# Altium PCB 智能家居-电灯-电力板.PcbDoc
Units mm, origin at the board's own origin, x right, y up, seen from the top; angles counter-clockwise.
Board outline 65 x 65 mm, 2 copper layers (Top Layer, Bottom Layer); 15 components, 12 nets, 45 pads, 0 vias.
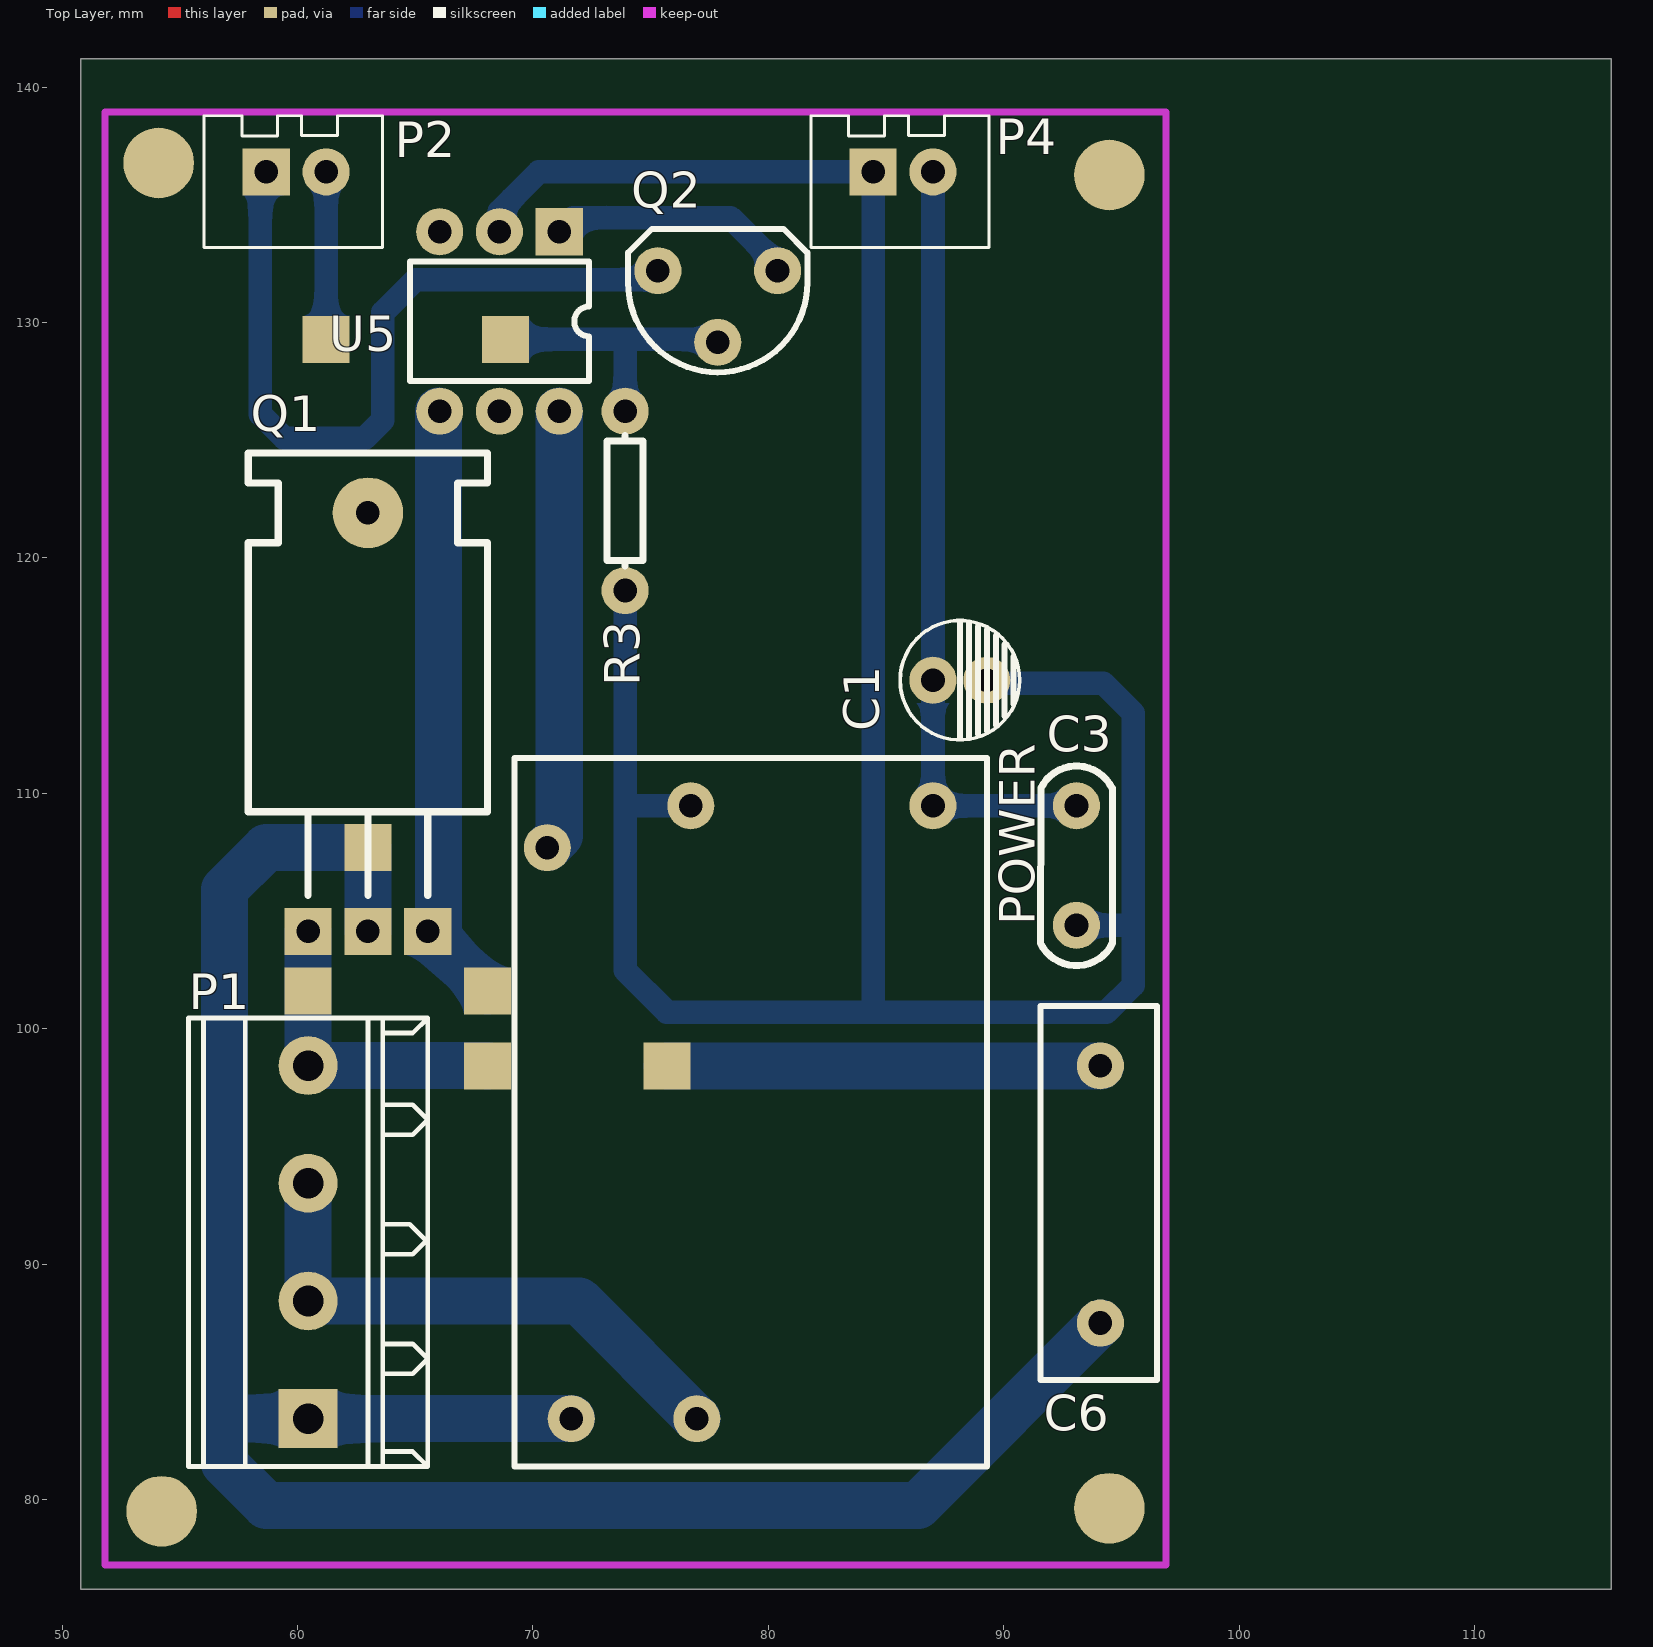
[diagram p0: Top Layer view]
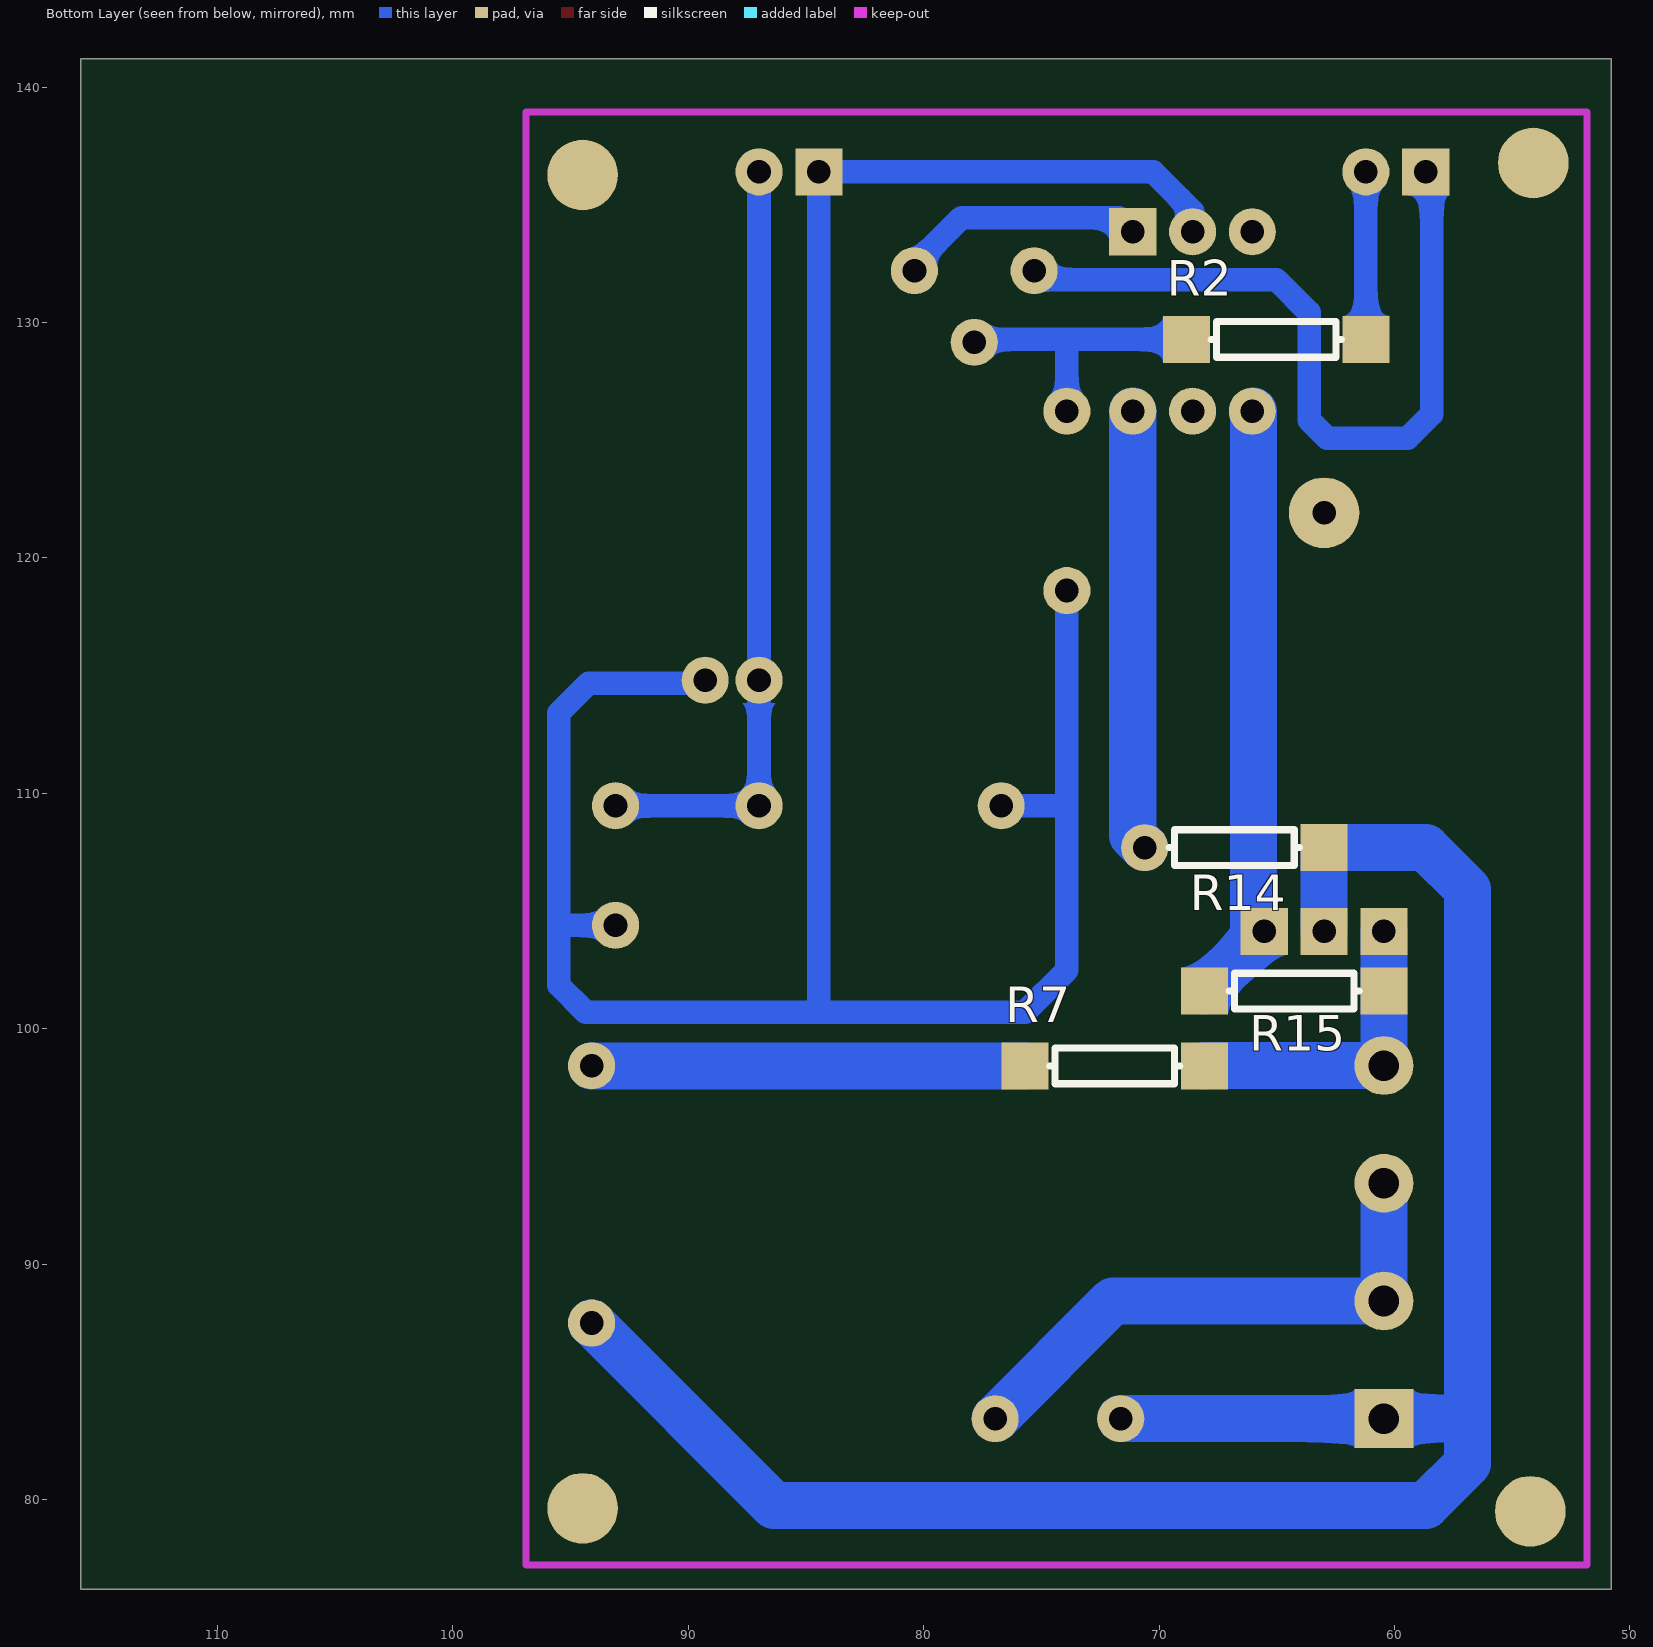
[diagram p1: Bottom Layer view, seen from below]

## Layer stack, top to bottom
Top Solder: solder mask 0.0102, Solder Resist, Dk 3.5
Top Layer: signal copper 0.0356
Dielectric 1: dielectric 0.32, FR-4, Dk 4.8
Bottom Layer: signal copper 0.0356
Bottom Solder: solder mask 0.0102, Solder Resist, Dk 3.5

## Board outline
50.8,76.2 115.8,76.2 115.8,141.2 50.8,141.2

## Design rules (kind name [scope] priority, off if disabled: settings)
Clearance [All] p1: gap=0.5
PolygonConnect [All] p1: connectstyle=Relief reliefconductorwidth=0.254 reliefentries=4 polygonreliefangle="90 Angle" airgapwidth=0.254
RoutingVias [All] p1: holewidth=1 width=2 viastyle="Through Hole" minholewidth=0.711 minwidth=1.27 maxholewidth=0.711 maxwidth=1.27
SolderMaskExpansion [All] p1: expansion=0.102
Width [All] p1: maxlimit=5 minlimit=0.5 preferedwidth=0.5 minimp=50.000000 maximp=50.000000 favimp=50.000000
30 further rules are at their usual default settings.

## Components (designator, comment, footprint, x,y, rotation, side; value= is the part's Value field where it differs from the comment)
C1 "Cap Pol1" CD5 86.995,114.808 r90 top
C3 "0.01uF" 0.1UF 93.091,106.934 r270 top
C6 "Cap" 0.1UF/275V 94.107,98.425 r270 top
P1 "电源端口" JK128-500-4P 60.452,83.439 r180 top
P2 "双向可控硅控制端口" TJC3-2A 58.674,136.398 r0 top
P4 "控制板电源端口" TJC3-2A 84.455,136.398 r0 top
POWER "220/5开关电源" 220/5开关电源 71.628,83.439 r90 top
Q1 "Triac" TO-220(2) 60.452,104.14 r0 top
Q2 "NPN" TO-92D 77.851,132.207 r180 top
R2 "4.7K" AXIAL0.3#1 65.024,129.286 r0 bottom
R3 "4.7K" AXIAL0.3#2 73.914,122.428 r270 top
R7 "100" AXIAL0.3#1 71.882,98.425 r0 bottom
R14 "300" AXIAL0.3#3 66.802,107.696 r0 bottom
R15 "300" AXIAL0.3#1 64.262,101.6 r0 bottom
U5 "MOC3061" DIP-6N 71.12,133.858 r270 top

## Footprints (in the part's own frame and the unit in brackets; to place one, negate y for a bottom-side part, rotate by r counter-clockwise, add the part's x,y. Pads: shape width x height; smd on the part's side, far side on the other; paste and mask are expansions set on the pad)
0.1UF [mm]
  round 2 hole 1: 1(-2.54,0) 2(2.54,0)
  silkscreen extent -4.22,-1.52 4.25,1.53
0.1UF/275V [mm]
  round 2 hole 1: 1(0,0) 2(10.922,0)
  silkscreen extent -2.54,-2.54 13.33,2.41
220/5开关电源 [mm]
  round 2 hole 1: 1(0,0) 2(0,-5.334) 3(26.035,-5.08) 4(26.035,-15.367)
  silkscreen extent -2.03,-17.65 28.07,2.41
AXIAL0.3#1 [mm]
  rect 2x2 all layers, no hole: 1(-3.81,0) 2(3.81,0)
  silkscreen extent -2.77,-0.76 2.77,0.76
AXIAL0.3#2 [mm]
  round 2 hole 1: 1(-3.81,0) 2(3.81,0)
  silkscreen extent -2.77,-0.76 2.77,0.76
AXIAL0.3#3 [mm]
  rect 2x2 all layers, no hole: 1(-3.81,0)
  round 2 hole 1: 2(3.81,0)
  silkscreen extent -2.77,-0.76 2.77,0.76
CD5 [mm]
  round 2 hole 1: 1(0,0) 2(0,-2.286)
  silkscreen extent -2.54,-3.68 2.54,1.4
DIP-6N [mm]
  rect 2x2 hole 1: 1(0,0)
  round 2 hole 1: 2(0,-2.54) 3(0,-5.08) 4(7.62,-5.08) 5(7.62,-2.54) 6(7.62,0)
  silkscreen extent 1.27,-6.35 6.35,1.27
JK128-500-4P [mm]
  rect 2.5x2.5 hole 1.3: 1(0,0)
  round 2.5 hole 1.3: 2(0,-5) 3(0,-10) 4(0,-15)
  silkscreen extent -5.08,-17.02 5.08,2.03
TJC3-2A [mm]
  rect 2x2 hole 1: 1(0,0)
  round 2 hole 1: 2(2.54,0)
  silkscreen extent -2.64,-3.2 4.93,2.39
TO-92D [mm]
  round 2 hole 1: 1(-2.54,0) 2(0,3.048) 3(2.54,0)
  silkscreen extent -3.81,-1.78 3.81,4.32
TO-220(2) [mm]
  round 3 hole 1: 0(2.54,17.78)
  rect 2x2 hole 1: 1(0,0) 2(2.54,0) 3(5.08,0)
  silkscreen extent -2.54,1.52 7.62,20.32

## Part data
C1: "Polarized Capacitor (Radial)"
C3: library part Cap, "Capacitor"
C6: "Capacitor"
P1: library part "Header 4", "Header, 4-Pin"
P2 P4: library part "Header 2", "Header, 2-Pin"
Q1: "Silicon Bidirectional Triode Thyristor"
Q2: "NPN Bipolar Transistor"
R2 R3 R7 R14 R15: library part Res1, "Resistor"
U5: library part OPTOTRIAC

## Free pads (board coordinates)
  round 3 all layers, no hole: 2(54.229,79.502) 3(94.488,79.629) 4(94.488,136.271) 5(54.102,136.779)

## Nets (pads, with @x,y where several pads share a name; then routed paths per layer and width w, separated by ;. In a path a pad name is that pad's centre, name@x,y a point inside that pad or via, vN(x,y) a via of type N, cw(c..) or ccw(c..) an arc to the next point about the centre after c; other vN are vias at no path point)
GND: C1.2 C3.2 P4.1 POWER.3 R3.2 U5.2 | length 115.7
  Bottom Layer w1: U5.2 68.58,134.732 70.246,136.398 P4.1 84.455,100.838 ; R3.2 73.914,109.728 ; POWER.3 74.168,109.474 73.914,109.728 ; C1.2 89.408,114.681 94.234,114.681 95.504,113.411 95.504,104.267 ; C3.2 95.377,104.394 95.504,104.267 ; 73.914,109.728 73.914,102.489 75.692,100.711 94.361,100.711 95.504,101.854 95.504,104.267
L: C6.2 P1.1 POWER.1 Q1.2 R14.1 | length 90.5
  Bottom Layer w2: 57.023,83.439 P1.1 POWER.1 ; Q1.2 R14.1 58.674,107.696 56.896,105.918 56.896,81.534 58.674,79.756 86.36,79.756 C6.2
L_OUT: P1.4 Q1.1 R7.1 R15.1 | length 13.3
  Bottom Layer w2: Q1.1 R15.1 P1.4 68.058,98.439 R7.1
MCU-VCC: C1.1 C3.1 P4.2 POWER.4 | length 33
  Bottom Layer w1: P4.2 C1.1 POWER.4 C3.1
N: P1.2 P1.3 POWER.2 | length 23.6
  Bottom Layer w2: P1.3 P1.2 71.962,88.439 POWER.2
NetC6_1: C6.1 R7.2 | length 18.4
  Bottom Layer w2: R7.2 C6.1
NetP2_1: P2.1 Q2.3 | length 33.4
  Bottom Layer w1: P2.1 58.42,136.144 58.42,126.111 59.436,125.095 62.865,125.095 63.627,125.857 63.627,130.429 65.024,131.826 74.676,131.826 Q2.3@75.311,132.461
NetP2_2: P2.2 R2.1 | length 6.9
  Bottom Layer w1: R2.1 P2.2@61.214,136.144
NetQ1_3: Q1.3 R15.2 U5.4 | length 25.5
  Bottom Layer w2: U5.4@65.992,126.238 65.992,103.68 R15.2
NetQ2_1: Q2.1 U5.1 | length 10.3
  Bottom Layer w1: U5.1 71.723,134.461 78.391,134.461 Q2.1@80.391,132.461
NetQ2_2: Q2.2 R2.2 R3.1 | length 12.2
  Bottom Layer w1: R2.2 74.041,129.286 ; R3.1 73.914,129.159 74.041,129.286 ; Q2.2@77.851,129.413 77.724,129.286 74.041,129.286
NetR14_2: R14.2 U5.6 | length 18.8
  Bottom Layer w2: R14.2 71.12,108.204 U5.6
pads on no net: Q1.0 U5.3 U5.5

## Keep-outs
Keep-Out Layer:
  lines w0.3: 51.816,77.216 51.816,138.938 96.901,138.938 96.901,77.216 51.816,77.216

## Silkscreen, mask and mechanical layers (free items; w line width, h text height)
Drill Drawing:
  text ".LEGEND" at 120.88,81.28 h1.52
  text "Drill Drawing." at 120.88,78.74 h1.52

## Dimensions
51.816,77.216 to 51.816,138.938 on Mechanical 1
51.816,77.216 to 96.901,77.216 on Mechanical 1